# Altium PCB PCB2.PcbDoc
Units mil, origin at the board's own origin, x right, y up, seen from the top; angles counter-clockwise.
Board outline 3555 x 3545 mil, 4 copper layers (Top Layer, PWR, GND, Bottom Layer); 10 components, 72 nets, 433 pads, 0 vias.
Unrouted connection lines stored in the file: 94.
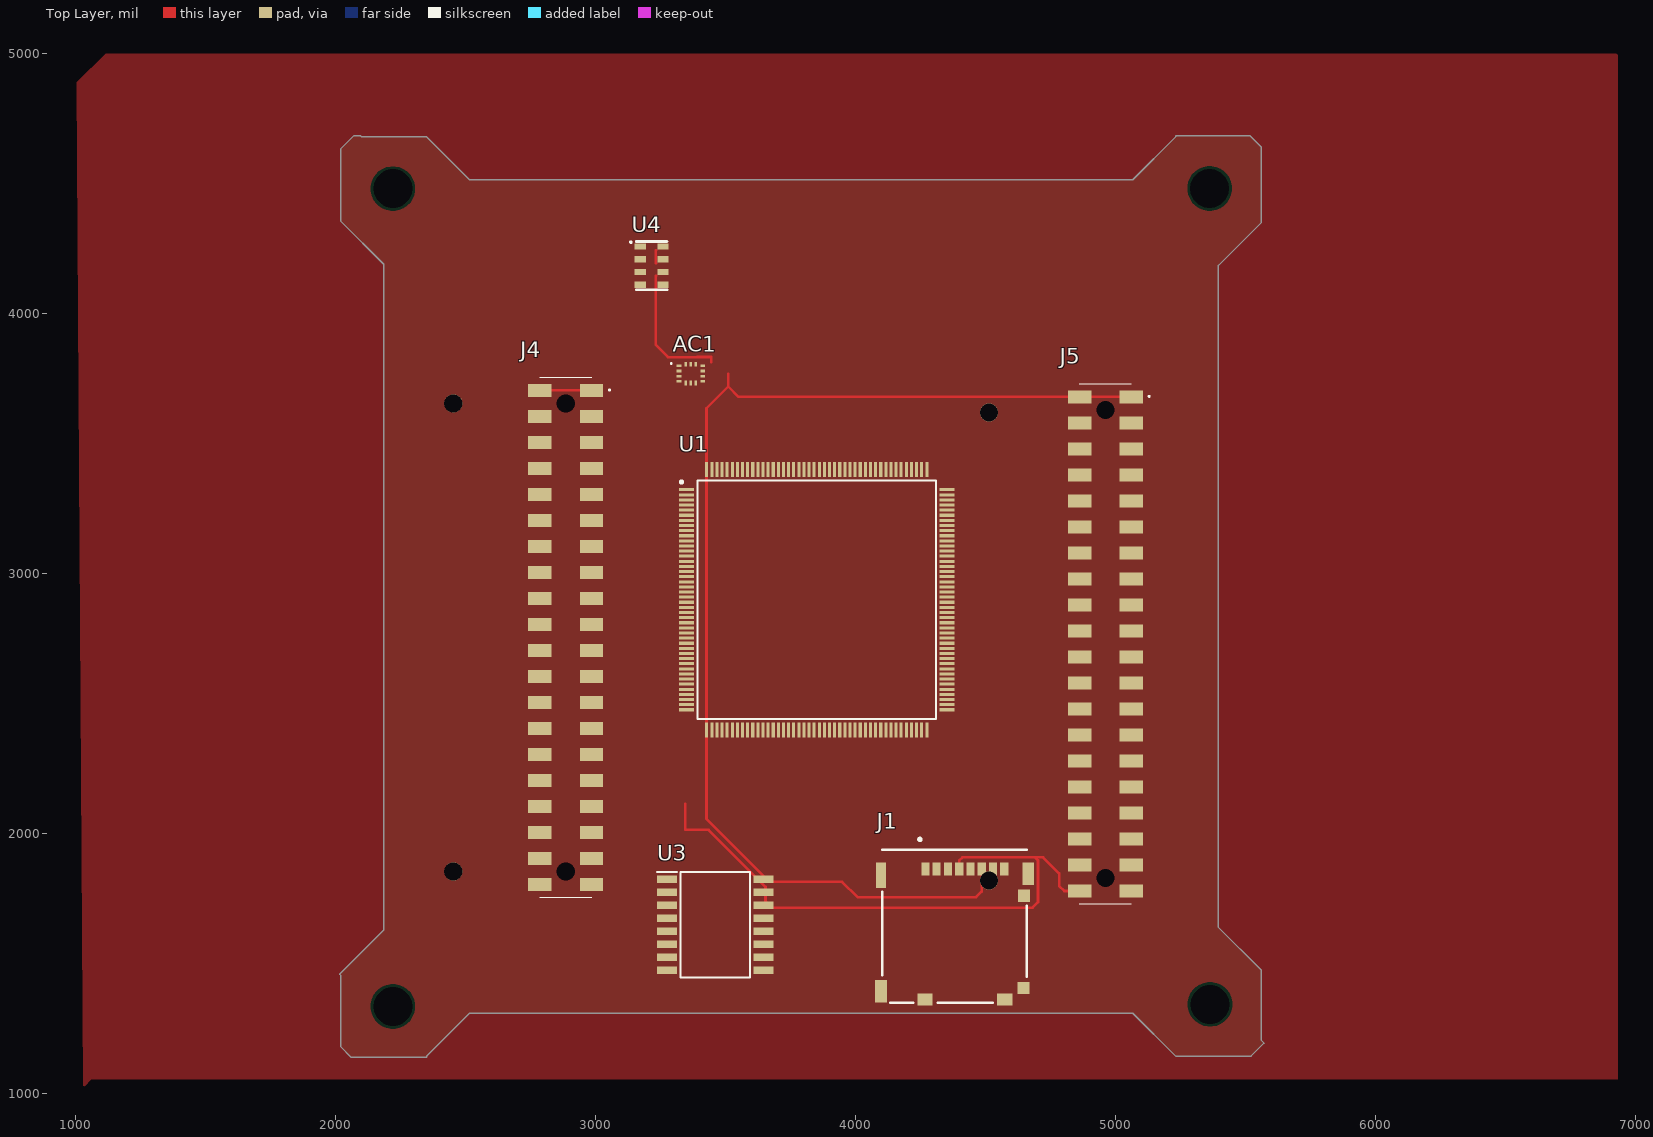
[diagram p0: Top Layer view]
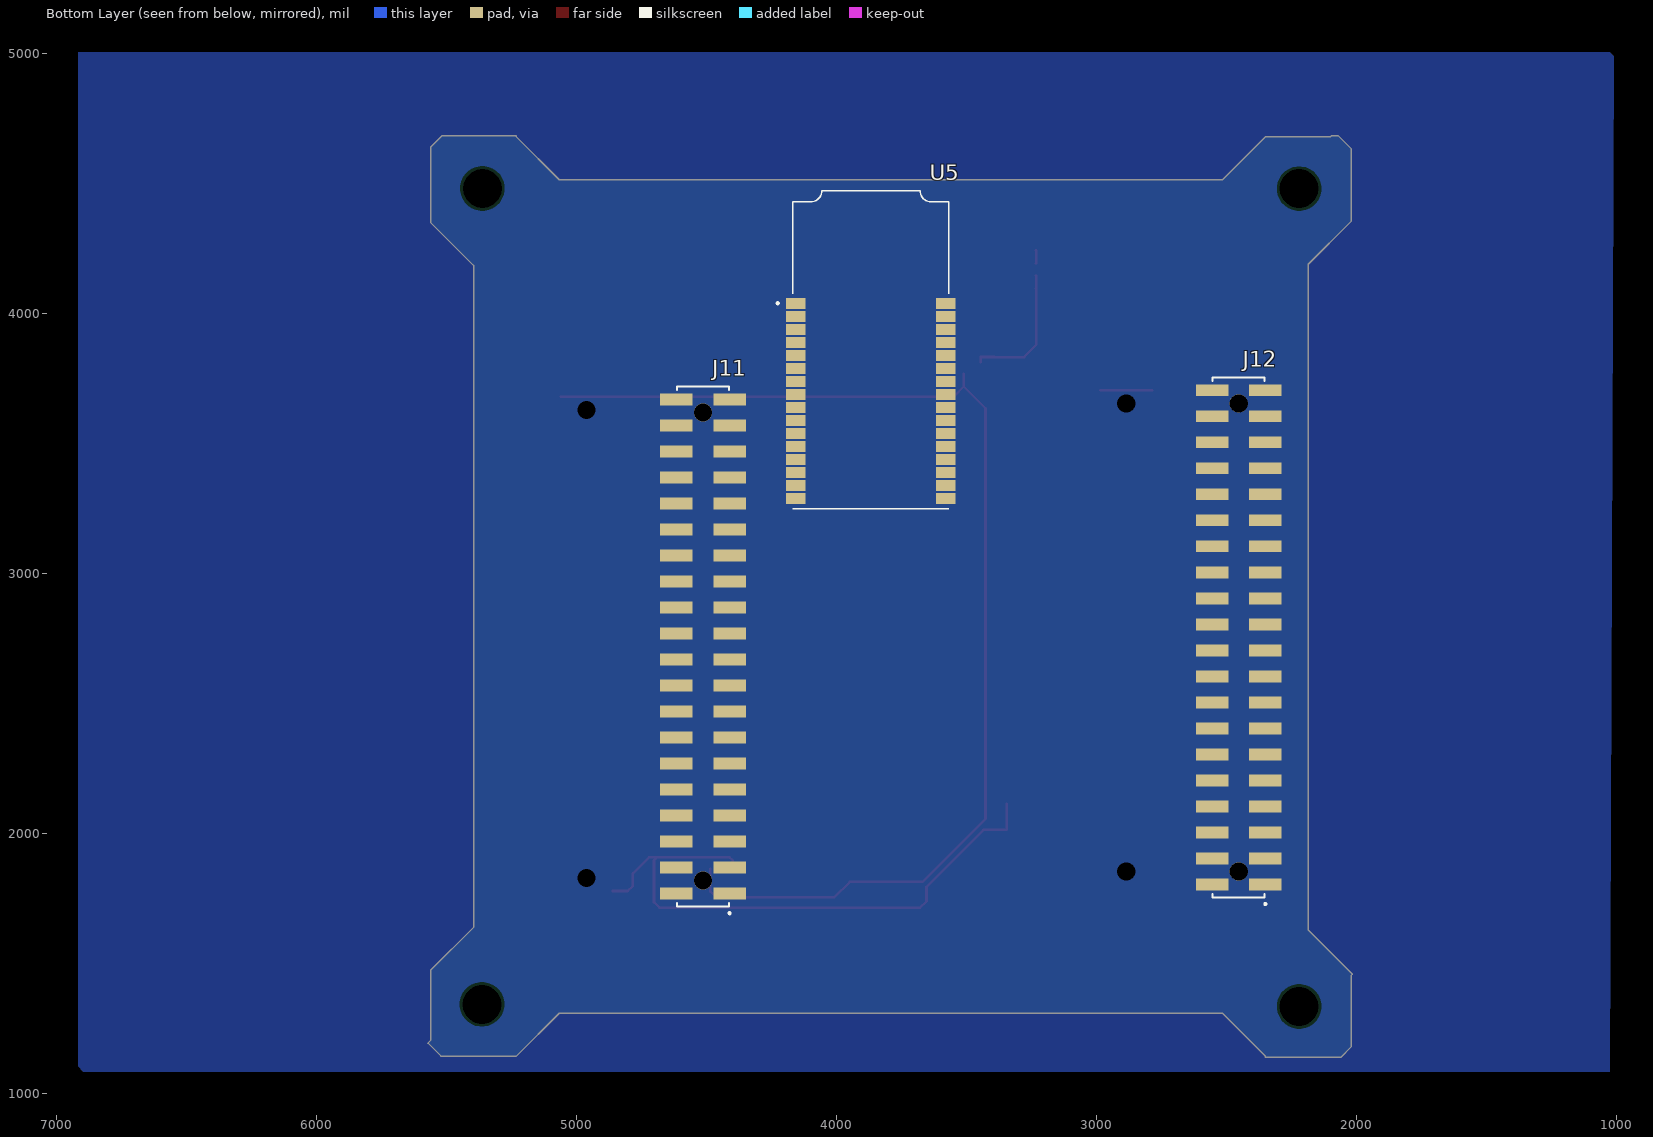
[diagram p1: Bottom Layer view, seen from below]
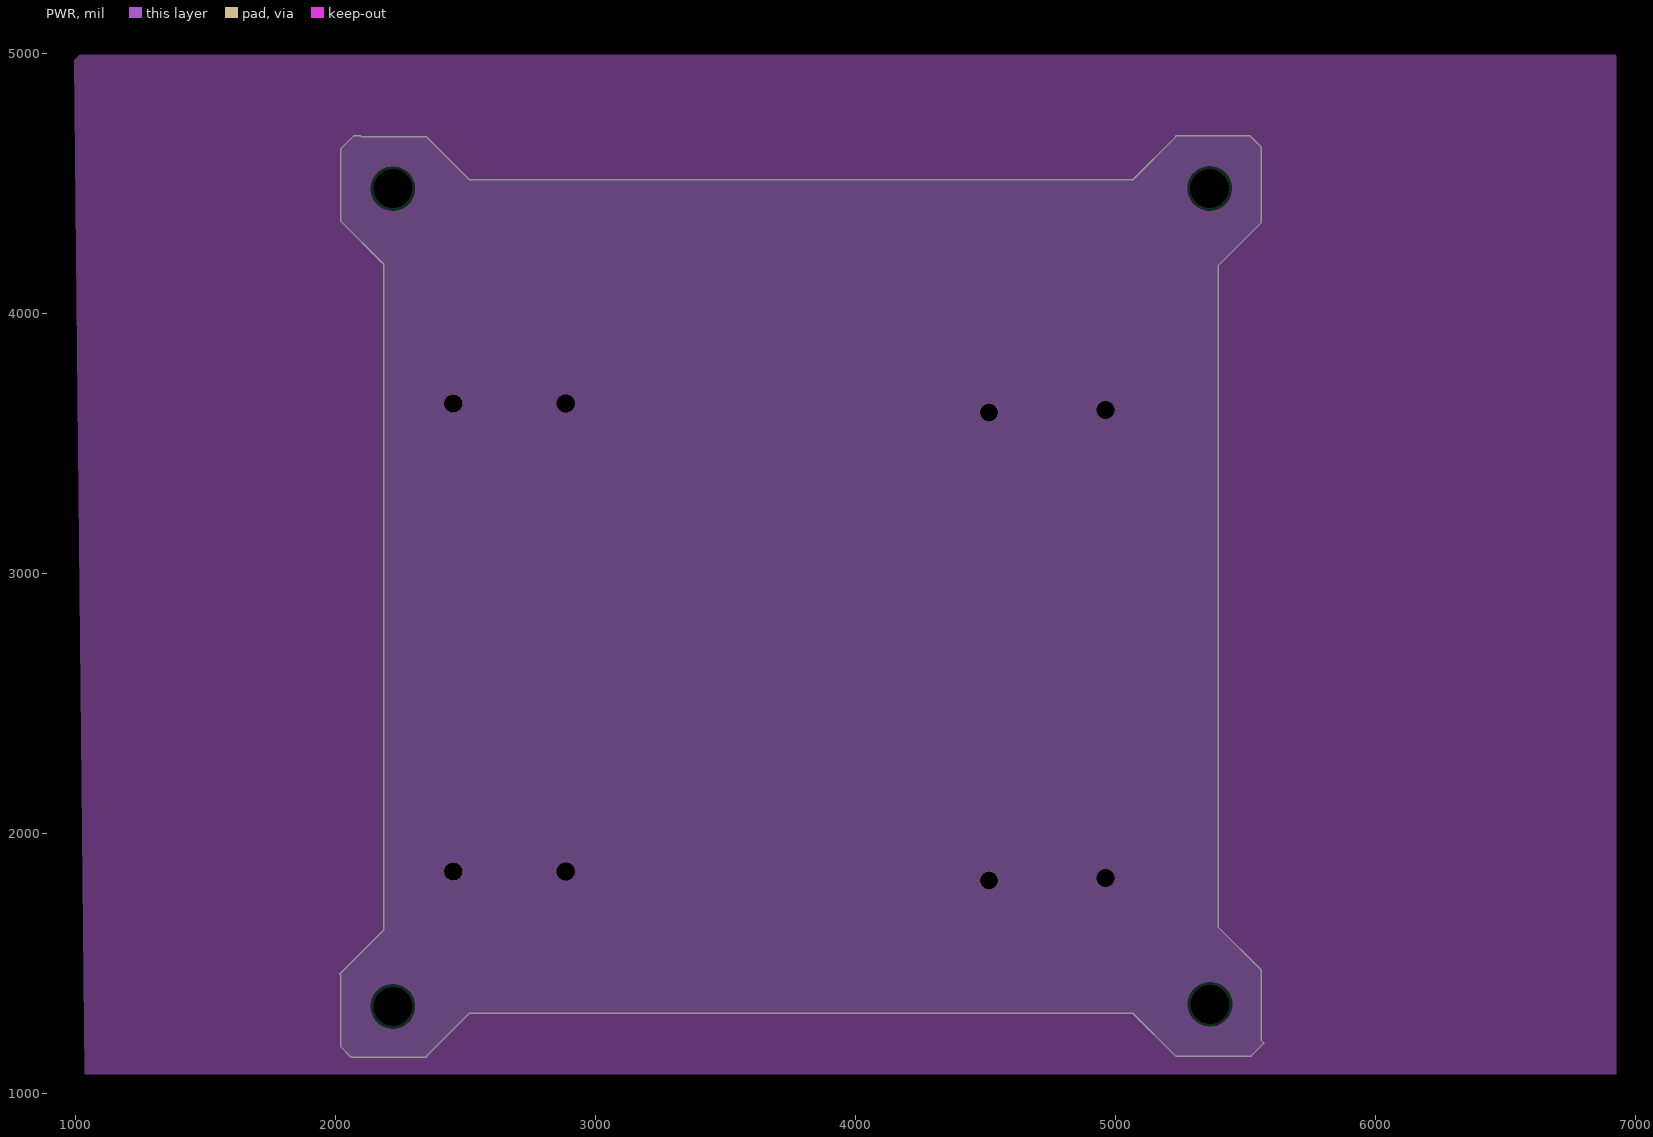
[diagram p2: PWR]
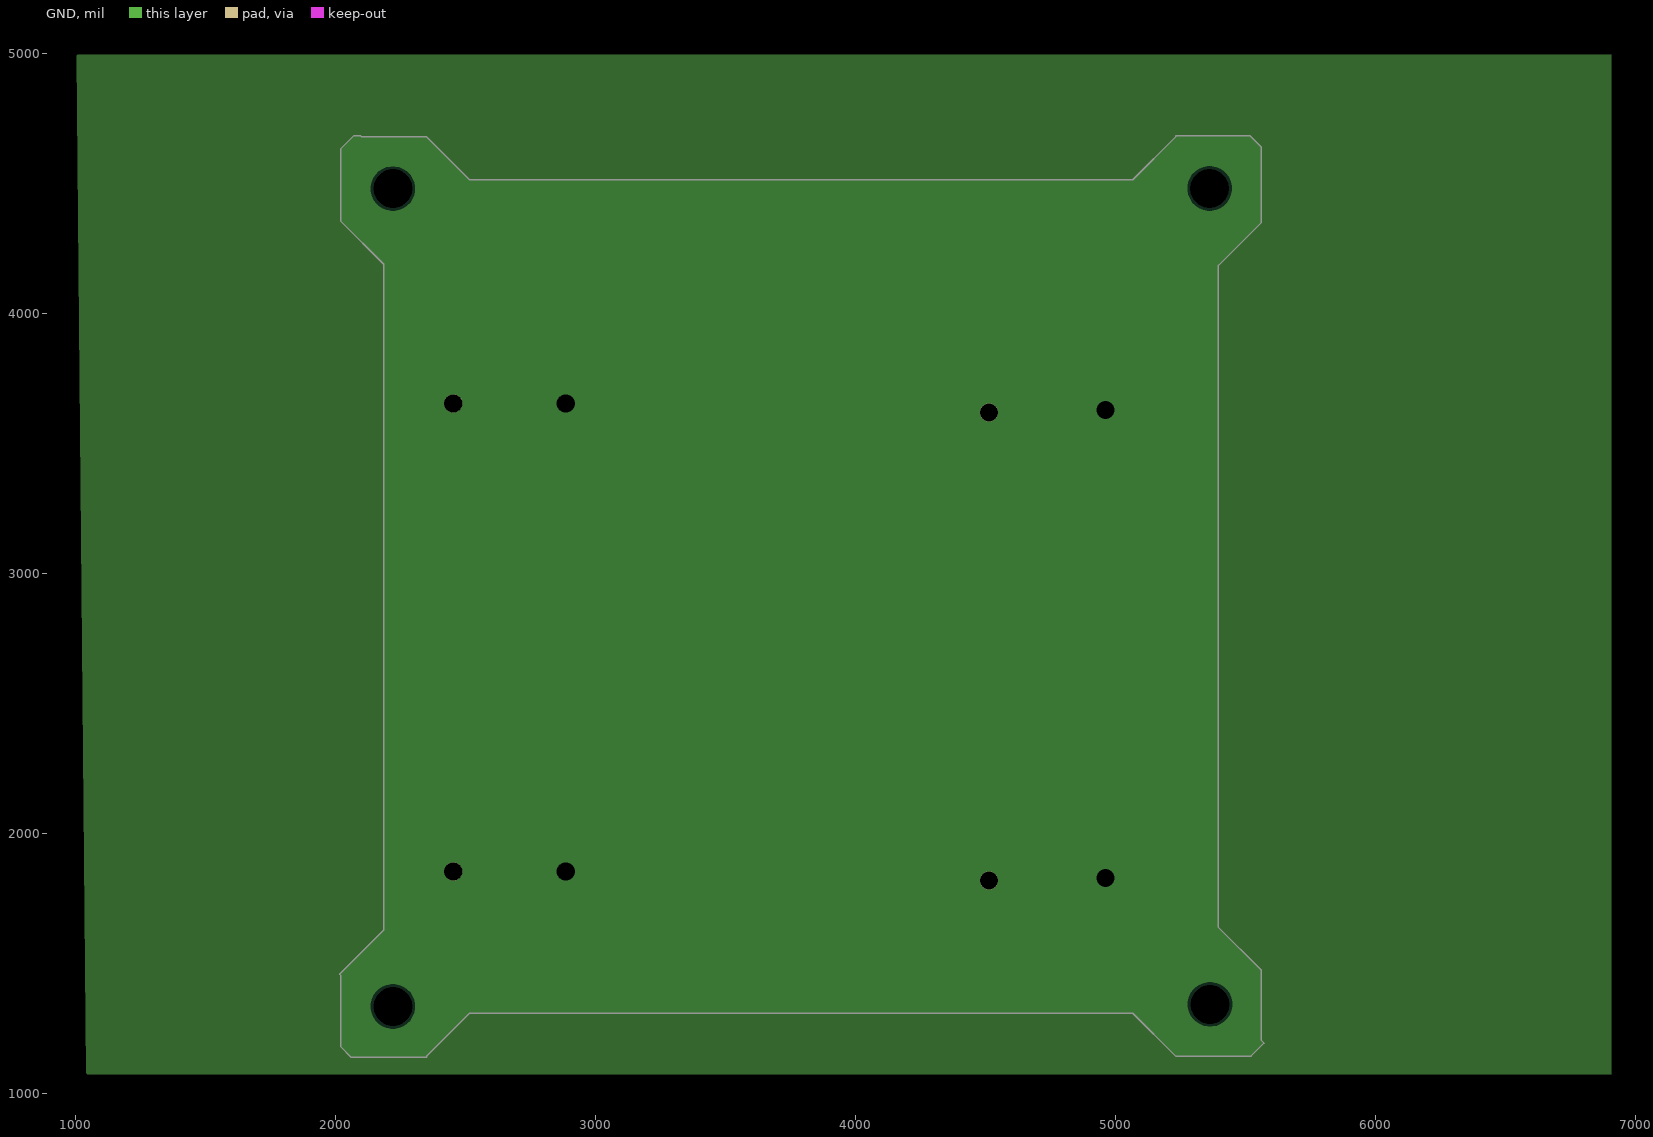
[diagram p3: GND]

## Layer stack, top to bottom
Top Solder: solder mask 0.4, Solder Resist, Dk 3.5
Top Layer: signal copper 1.4
Dielectric 2: prepreg 12.6, FR-4, Dk 4.8
PWR: signal copper 0.3543
Dielectric 1: dielectric 12.6, FR-4, Dk 4.8
GND: signal copper 0.3543
Dielectric 3: prepreg 12.6, FR-4, Dk 4.8
Bottom Layer: signal copper 1.4
Bottom Solder: solder mask 0.4, Solder Resist, Dk 3.5

## Board outline
2185,1630 2015,1460 2020,1455 2020,1180 2060,1140 2350,1140 2350,1145 2515,1310 5065,1310 5230,1145 5520,1145 5570,1195 5560,1205 5560,1475 5395,1640 5395,4185.72 5560,4350.72 5560,4640 5515,4685 5230,4685 5230,4680 5065,4515 2515,4515 2350,4680 2100,4680 2095,4685 2070,4685 2020,4635 2020,4355 2185,4190

## Design rules (kind name [scope] priority, off if disabled: settings)
Clearance [All] p1: gap=10 ignorepadtopadclearanceinfootprint=FALSE except(0: Arc-Hole Track-Hole SMDPad-Hole THPad-Hole Via-Hole Fill-Hole Poly-Hole Region-Hole Text-Hole)
PolygonConnect [All] p1: connectstyle=Relief reliefconductorwidth=10 reliefentries=4 polygonreliefangle="90 Angle" airgapwidth=10
RoutingVias [All] p1: holewidth=28 width=50 viastyle="Through Hole" minholewidth=28 minwidth=50 maxholewidth=28 maxwidth=50
SolderMaskExpansion [All] p1: expansion=4 istentingtop=FALSE
Width [All] p1: maxlimit=10 minlimit=10 preferedwidth=10
30 further rules are at their usual default settings.

## Components (designator, comment, footprint, x,y, rotation, side; value= is the part's Value field where it differs from the comment)
AC1 "LSM6DSOTR" LGA-14(2.5X3X0.86) 3365.77,3769.84 r0 top
J1 "503182-1852" 5031821852 4380,1840 r0 top
J4 "HLE-120-02-L-DV-A" HLE-120-02-XXX-DV-A 2884.41,2755 r90 top
J5 "HLE-120-02-L-DV-A" HLE-120-02-XXX-DV-A 4960,2730 r90 top
J11 "HW-20-16-L-D-250-SM-A-TR" SAMTEC_HW-20-16-L-D-250-SM-A-TR 4410,1770 r90 bottom
J12 "HW-20-16-L-D-250-SM-A-TR" SAMTEC_HW-20-16-L-D-250-SM-A-TR 2350,1805 r90 bottom
U1 "STM32H747IGT6" QFP50P2600X2600X160-176N 3850,2900 r0 top
U3 "W25Q256JVFIQ" SOIC127P1032X264-16N 3460,1650 r0 top
U4 "MS561101BA03-50" MS561101BA03-50 3215,4185 r0 top
U5 "STLINK-V3MODS" MODULE_STLINK-V3MODS 3866.81,4430 r180 bottom

## Footprints (in the part's own frame and the unit in brackets; to place one, negate y for a bottom-side part, rotate by r counter-clockwise, add the part's x,y. Pads: shape width x height; smd on the part's side, far side on the other; paste and mask are expansions set on the pad)
5031821852 [mm]
  rect 0.8x1.24 smd: 1(-2.85,0.63) 2(-1.75,0.63) 3(-0.65,0.63) 4(0.45,0.63) 5(1.55,0.63) 6(2.65,0.63) 7(3.75,0.63) 8(4.85,0.63)
  rect 0.95x2.5 smd: 9(-7.195,0)
  rect 1.15x2.2 smd: 10(7.195,0.15) 15(-7.195,-11.33)
  rect 1.16x1.25 smd: 11(6.795,-2)
  rect 1.16x1.2 smd: 12(6.74,-11)
  rect 1.5x1.15 smd: 13(4.89,-12.125) 14(-2.89,-12.125)
  silkscreen extent -7.07,-12.45 7.07,3.66, body extent -7.47,-12.4 7.47,2.55, height 1.51
HLE-120-02-XXX-DV-A [mm]
  rect 1.27x2.29 smd: 1(24.13,-2.525) 2(24.13,2.525) 3(21.59,-2.525) 4(21.59,2.525) 5(19.05,-2.525) 6(19.05,2.525) 7(16.51,-2.525) 8(16.51,2.525) 9(13.97,-2.525) 10(13.97,2.525) 11(11.43,-2.525) 12(11.43,2.525) 13(8.89,-2.525) 14(8.89,2.525) 15(6.35,-2.525) 16(6.35,2.525) 17(3.81,-2.525) 18(3.81,2.525) 19(1.27,-2.525) 20(1.27,2.525) 21(-1.27,-2.525) 22(-1.27,2.525) 23(-3.81,-2.525) 24(-3.81,2.525) 25(-6.35,-2.525) 26(-6.35,2.525) 27(-8.89,-2.525) 28(-8.89,2.525) 29(-11.43,-2.525) 30(-11.43,2.525) 31(-13.97,-2.525) 32(-13.97,2.525) 33(-16.51,-2.525) 34(-16.51,2.525) 35(-19.05,-2.525) 36(-19.05,2.525) 37(-21.59,-2.525) 38(-21.59,2.525) 39(-24.13,-2.525) 40(-24.13,2.525)
  round 0.89 hole 1.78 unplated: 41(22.86,0) 42(-22.86,0)
  silkscreen extent -25.4,-4.33 25.4,2.54
LGA-14(2.5X3X0.86) [mm]
  rect 0.475x0.25 smd: 1(-1.163,0.75) 2(-1.163,0.25) 3(-1.163,-0.25) 4(-1.163,-0.75) 8(1.163,-0.75) 9(1.163,-0.25) 10(1.163,0.25) 11(1.163,0.75)
  rect 0.25x0.475 smd: 5(-0.5,-0.912) 6(0,-0.912) 7(0.5,-0.912) 12(0.5,0.913) 13(0,0.913) 14(-0.5,0.913)
  silkscreen extent -1.93,0.95 -1.88,1.01, body extent -1.5,-1.25 1.5,1.25, height 0.86
MODULE_STLINK-V3MODS [mil]
  rect 74.8x42.13 smd: 1(-288.19,-390) 2(-288.19,-440) 3(-288.19,-490) 4(-288.19,-540) 5(-288.19,-590) 6(-288.19,-640) 7(-288.19,-690) 8(-288.19,-740) 9(-288.19,-790) 10(-288.19,-840) 11(-288.19,-890) 12(-288.19,-940) 13(-288.19,-990) 14(-288.19,-1040) 15(-288.19,-1090) 16(-288.19,-1140) 17(288.19,-1140) 18(288.19,-1090) 19(288.19,-1040) 20(288.19,-990) 21(288.19,-940) 22(288.19,-890) 23(288.19,-840) 24(288.19,-790) 25(288.19,-740) 26(288.19,-690) 27(288.19,-640) 28(288.19,-590) 29(288.19,-540) 30(288.19,-490) 31(288.19,-440) 32(288.19,-390)
  silkscreen extent -362,-1180 300,43
MS561101BA03-50 [mm]
  rect 1.1x0.6 smd: 1(-1.1,1.875) 2(-1.1,0.625) 3(-1.1,-0.625) 4(-1.1,-1.875) 5(1.1,-1.875) 6(1.1,-0.625) 7(1.1,0.625) 8(1.1,1.875)
  silkscreen extent -2.08,-2.35 1.5,2.35, body extent -1.5,-2.5 1.5,2.5, height 0.95
QFP50P2600X2600X160-176N [mm]
  rect 1.45x0.3 smd: 1(-12.725,10.75) 2(-12.725,10.25) 3(-12.725,9.75) 4(-12.725,9.25) 5(-12.725,8.75) 6(-12.725,8.25) 7(-12.725,7.75) 8(-12.725,7.25) 9(-12.725,6.75) 10(-12.725,6.25) 11(-12.725,5.75) 12(-12.725,5.25) 13(-12.725,4.75) 14(-12.725,4.25) 15(-12.725,3.75) 16(-12.725,3.25) 17(-12.725,2.75) 18(-12.725,2.25) 19(-12.725,1.75) 20(-12.725,1.25) 21(-12.725,0.75) 22(-12.725,0.25) 23(-12.725,-0.25) 24(-12.725,-0.75) 25(-12.725,-1.25) 26(-12.725,-1.75) 27(-12.725,-2.25) 28(-12.725,-2.75) 29(-12.725,-3.25) 30(-12.725,-3.75) 31(-12.725,-4.25) 32(-12.725,-4.75) 33(-12.725,-5.25) 34(-12.725,-5.75) 35(-12.725,-6.25) 36(-12.725,-6.75) 37(-12.725,-7.25) 38(-12.725,-7.75) 39(-12.725,-8.25) 40(-12.725,-8.75) 41(-12.725,-9.25) 42(-12.725,-9.75) 43(-12.725,-10.25) 44(-12.725,-10.75) 89(12.725,-10.75) 90(12.725,-10.25) 91(12.725,-9.75) 92(12.725,-9.25) 93(12.725,-8.75) 94(12.725,-8.25) 95(12.725,-7.75) 96(12.725,-7.25) 97(12.725,-6.75) 98(12.725,-6.25) 99(12.725,-5.75) 100(12.725,-5.25) 101(12.725,-4.75) 102(12.725,-4.25) 103(12.725,-3.75) 104(12.725,-3.25) 105(12.725,-2.75) 106(12.725,-2.25) 107(12.725,-1.75) 108(12.725,-1.25) 109(12.725,-0.75) 110(12.725,-0.25) 111(12.725,0.25) 112(12.725,0.75) 113(12.725,1.25) 114(12.725,1.75) 115(12.725,2.25) 116(12.725,2.75) 117(12.725,3.25) 118(12.725,3.75) 119(12.725,4.25) 120(12.725,4.75) 121(12.725,5.25) 122(12.725,5.75) 123(12.725,6.25) 124(12.725,6.75) 125(12.725,7.25) 126(12.725,7.75) 127(12.725,8.25) 128(12.725,8.75) 129(12.725,9.25) 130(12.725,9.75) 131(12.725,10.25) 132(12.725,10.75)
  rect 0.3x1.45 smd: 45(-10.75,-12.725) 46(-10.25,-12.725) 47(-9.75,-12.725) 48(-9.25,-12.725) 49(-8.75,-12.725) 50(-8.25,-12.725) 51(-7.75,-12.725) 52(-7.25,-12.725) 53(-6.75,-12.725) 54(-6.25,-12.725) 55(-5.75,-12.725) 56(-5.25,-12.725) 57(-4.75,-12.725) 58(-4.25,-12.725) 59(-3.75,-12.725) 60(-3.25,-12.725) 61(-2.75,-12.725) 62(-2.25,-12.725) 63(-1.75,-12.725) 64(-1.25,-12.725) 65(-0.75,-12.725) 66(-0.25,-12.725) 67(0.25,-12.725) 68(0.75,-12.725) 69(1.25,-12.725) 70(1.75,-12.725) 71(2.25,-12.725) 72(2.75,-12.725) 73(3.25,-12.725) 74(3.75,-12.725) 75(4.25,-12.725) 76(4.75,-12.725) 77(5.25,-12.725) 78(5.75,-12.725) 79(6.25,-12.725) 80(6.75,-12.725) 81(7.25,-12.725) 82(7.75,-12.725) 83(8.25,-12.725) 84(8.75,-12.725) 85(9.25,-12.725) 86(9.75,-12.725) 87(10.25,-12.725) 88(10.75,-12.725) 133(10.75,12.725) 134(10.25,12.725) 135(9.75,12.725) 136(9.25,12.725) 137(8.75,12.725) 138(8.25,12.725) 139(7.75,12.725) 140(7.25,12.725) 141(6.75,12.725) 142(6.25,12.725) 143(5.75,12.725) 144(5.25,12.725) 145(4.75,12.725) 146(4.25,12.725) 147(3.75,12.725) 148(3.25,12.725) 149(2.75,12.725) 150(2.25,12.725) 151(1.75,12.725) 152(1.25,12.725) 153(0.75,12.725) 154(0.25,12.725) 155(-0.25,12.725) 156(-0.75,12.725) 157(-1.25,12.725) 158(-1.75,12.725) 159(-2.25,12.725) 160(-2.75,12.725) 161(-3.25,12.725) 162(-3.75,12.725) 163(-4.25,12.725) 164(-4.75,12.725) 165(-5.25,12.725) 166(-5.75,12.725) 167(-6.25,12.725) 168(-6.75,12.725) 169(-7.25,12.725) 170(-7.75,12.725) 171(-8.25,12.725) 172(-8.75,12.725) 173(-9.25,12.725) 174(-9.75,12.725) 175(-10.25,12.725) 176(-10.75,12.725)
  silkscreen extent -13.32,-11.65 11.65,11.65
SAMTEC_HW-20-16-L-D-250-SM-A-TR [mm]
  rect 1.14x3.175 smd: 01(0,0) 02(0,5.205) 03(2.54,0) 04(2.54,5.205) 05(5.08,0) 06(5.08,5.205) 07(7.62,0) 08(7.62,5.205) 09(10.16,0) 10(10.16,5.205) 11(12.7,0) 12(12.7,5.205) 13(15.24,0) 14(15.24,5.205) 15(17.78,0) 16(17.78,5.205) 17(20.32,0) 18(20.32,5.205) 19(22.86,0) 20(22.86,5.205) 21(25.4,0) 22(25.4,5.205) 23(27.94,0) 24(27.94,5.205) 25(30.48,0) 26(30.48,5.205) 27(33.02,0) 28(33.02,5.205) 29(35.56,0) 30(35.56,5.205) 31(38.1,0) 32(38.1,5.205) 33(40.64,0) 34(40.64,5.205) 35(43.18,0) 36(43.18,5.205) 37(45.72,0) 38(45.72,5.205) 39(48.26,0) 40(48.26,5.205)
  round 1.78 hole 1.78 unplated: ""(1.27,2.603) ""(46.99,2.603)
  silkscreen extent -2.02,-0.1 49.53,5.14
SOIC127P1032X264-16N [mm]
  rect 1.93x0.7 smd: 1(-4.71,4.445) 2(-4.71,3.175) 3(-4.71,1.905) 4(-4.71,0.635) 5(-4.71,-0.635) 6(-4.71,-1.905) 7(-4.71,-3.175) 8(-4.71,-4.445) 9(4.71,-4.445) 10(4.71,-3.175) 11(4.71,-1.905) 12(4.71,-0.635) 13(4.71,0.635) 14(4.71,1.905) 15(4.71,3.175) 16(4.71,4.445)
  silkscreen extent -5.68,-5.14 3.4,5.15, body extent -5.16,-5.14 5.16,5.14, height 2.64

## Part data
AC1: "Accelerometer", Manufacturer_Name=STMicroelectronics, Mouser Part Number=511-LSM6DSOTR, Arrow Part Number=LSM6DSOTR, Arrow Price/Stock=https://www.arrow.com/en/products/lsm6dsotr/stmicroelectronics?region=nac, Datasheet Link=https://www.st.com/resource/en/datasheet/lsm6dso.pdf, Manufacturer_Part_Number=LSM6DSOTR, Mouser Price/Stock=https://www.mouser.co.uk/ProductDetail/STMicroelectronics/LSM6DSOTR?qs=lc2O%252BfHJPVbD197C5c7oNw%3D%3D
J1: "Connector", Manufacturer_Name=Molex, Mouser Part Number=538-503182-1852, Datasheet Link=https://www.molex.com/pdm_docs/sd/5031821852_sd.pdf, Manufacturer_Part_Number=503182-1852, Mouser Price/Stock=https://www.mouser.co.uk/ProductDetail/Molex/503182-1852?qs=s7UCm7gO1bZmpyAhCKZ26g%3D%3D
J4 J5: "Connector", Manufacturer_Name=SAMTEC, Mouser Part Number=200-HLE12002LDVA, Arrow Part Number=HLE-120-02-L-DV-A, Arrow Price/Stock=https://www.arrow.com/en/products/hle-120-02-l-dv-a/samtec?region=nac, Datasheet Link=http://suddendocs.samtec.com/prints/hle-1xx-02-xxx-dv-xx-xx-xx-mkt.pdf, Manufacturer_Part_Number=HLE-120-02-L-DV-A, Mouser Price/Stock=https://www.mouser.co.uk/ProductDetail/Samtec/HLE-120-02-L-DV-A?qs=0lQeLiL1qyZq0rwGrAI%2FeQ%3D%3D
J11 J12: Package=None, Availability=Unavailable, MP=HW-20-16-L-D-250-SM-A-TR, Price=None
U1: "ARM Microcontrollers - MCU 16/32-BITS MICROS", Manufacturer_Name=STMicroelectronics, Mouser Part Number=511-STM32H747IGT6, Arrow Part Number=STM32H747IGT6, Arrow Price/Stock=https://www.arrow.com/en/products/stm32h747igt6/stmicroelectronics?region=nac, Datasheet Link=https://www.mouser.com/datasheet/2/389/dm00602212-1799407.pdf, Geometry.Height=1.6mm, Manufacturer_Part_Number=STM32H747IGT6, Mouser Price/Stock=https://www.mouser.co.uk/ProductDetail/STMicroelectronics/STM32H747IGT6?qs=%252B6g0mu59x7Kw%252BsPEalqvLg%3D%3D
U3: "Integrated Circuit", Manufacturer_Name=Winbond, Mouser Part Number=454-W25Q256JVFIQ, Arrow Part Number=W25Q256JVFIQ, Arrow Price/Stock=https://www.arrow.com/en/products/w25q256jvfiq/winbond-electronics?region=nac, Datasheet Link=https://www.winbond.com/hq/search-resource-file.jsp?partNo=W25Q256JVFIQ&type=datasheet, Height=2.64mm, Manufacturer_Part_Number=W25Q256JVFIQ, Mouser Price/Stock=https://www.mouser.co.uk/ProductDetail/Winbond/W25Q256JVFIQ?qs=qSfuJ%252Bfl%2Fd66Mf%2FmOCw4Wg%3D%3D
U4: "Integrated Circuit", Manufacturer_Name="TE Connectivity", Mouser Part Number=824-MS561101BA03-50, Arrow Part Number=MS561101BA03-50, Arrow Price/Stock=https://www.arrow.com/en/products/ms561101ba03-50/te-connectivity?region=nac, Datasheet Link=http://www.te.com/usa-en/search.html?q=ms5611&source=header, Manufacturer_Part_Number=MS561101BA03-50, Mouser Price/Stock=https://www.mouser.co.uk/ProductDetail/Measurement-Specialties/MS561101BA03-50?qs=%252BgKeJhng5iV%252BnCz6Qd5iDw%3D%3D
U5: library part CMP-005-000000-1, Package=None, Availability=Unavailable, Component Type=Standard, Design Item ID=STLINK-V3MODS, MP=STLINK-V3MODS, Pin Count=32, Price=None, Source=STLINK-V3MODS.SchLib

## Free pads (board coordinates)
  round 60 hole 150 unplated mask+10: 2(2220,1336) 2(2220,4481) 2(5360.95,4481.67) 2(5362.55,1344.01)

## Nets (pads, with @x,y where several pads share a name; then routed paths per layer and width w, separated by ;. In a path a pad name is that pad's centre, name@x,y a point inside that pad or via, vN(x,y) a via of type N, cw(c..) or ccw(c..) an arc to the next point about the centre after c; other vN are vias at no path point)
Battery-PWR: AC1.5 AC1.8 J1.4 J5.40 J11.02 U1.160 U3.1 U3.2 U3.3 U4.1 U4.2 | length 2431.5
  Top Layer w10: 3231.69,4194.61 3231,4194.61 3231,4243.82 3231.69,4243.82 ; 3344.57,2065 3344,2065 ; 3344.57,2115 3344,2115 3344,2065 ; J1.4 4397.72,1896.72 4410,1909 4690,1909 ; J5.40 4802,1780 4782,1800 4782,1847 4720,1909 4690,1909 ; 3344,2065 3344,2015 3344.57,2015 3434,2015 3653,1796 3653,1740 3677,1716 4680,1716 4701,1737 4701,1898 4690,1909
GND: AC1.1 AC1.2 AC1.3 AC1.6 AC1.7 J1.6 J4.1 J4.2 J5.1 J5.2 J11.39 J11.40 J12.39 J12.40 U3.10 U4.3 U4.4 | length 5311.5
  Top Layer w10: J4.2 2881,3705 2882,3706 2933,3706 2934,3705 J4.1 ; 3231.69,4096.18 3231,4096.18 ; 3231.69,4145.39 3231,4145.39 3231,4096.18 ; 3444.23,3813.92 3444.23,3833.6 3390.6,3833.6 3390,3833 3278,3833 3231,3880 3231,4096.18 ; 3509.69,3768.15 3509.69,3720 ; J1.6 4484.33,1777 4463.33,1756 4007,1756 3948,1815 3715.43,1815 3668,1815 3426,2057 3426,3636.31 3509.69,3720 ; J5.1 5011,3680 5010,3681 4911,3681 4910,3680 J5.2 3549.69,3680 3509.69,3720
GPIO1: J11.28 U1.1
GPIO2: J11.30 U1.2
GPIO3: J11.32 U1.3
GPIO4: J11.34 U1.171
GPIO5: J11.36 U1.170
GPIO6: J11.38 U1.9
GPIO7: J12.19 U1.34
GPIO8: J12.21 U1.37
GPIO9: J12.23 U1.60
GPIO10: J12.25 U1.61
GPIO11: J12.27 U1.62
GPIO12: J12.29 U1.63
GPIO13: J12.31 U1.90
GPIO14: J12.33 U1.91
GPIO15: J12.35 U1.94
GPIO16: J12.37 U1.95
GPIO17: J12.04 U1.96
GPIO18: J12.06 U1.97
GPIO19: J12.08 U1.98
GPIO20: J12.10 U1.110
GPIO21: J12.12 U1.111
GPIO22: J12.14 U1.114
GPIO23: J12.16 U1.115
GPIO24: J11.03 U1.116
GPIO25: J11.05 U1.117
GPIO26: J11.07 U1.118
GPIO27: J11.09 U1.127
GPIO28: J11.11 U1.128
GPIO29: J11.13 U1.129
GPIO30: J11.15 U1.130
HCLK: J1.5 U1.50
HCS: J1.2 U1.49
HMISO: J1.7 U1.51
HMOSI: J1.3 U1.52
I2C2-SCL: J12.15 U1.19
I2C2-SDA: J12.13 U1.18
IO2: U1.23 U3.7
NetAC1_12: AC1.12
NetR4_2: U3.9
NRST(Reset): U1.33 U5.31
SCL: AC1.13 U1.165 U4.8
SDA: AC1.14 U1.166 U4.7
SPI2-MISO: J12.05 U1.36
SPI2-MOSI: J12.03 U1.35
SPI2-SCK: J12.18 U1.86
SPI3-MISO: J12.07 U1.141
SPI3-MOSI: J12.09 U1.57
SPI3-SCK: J12.11 U1.140
SPI4-MISO: J11.04 U1.4
SPI4-MOSI: J11.06 U1.5
SPI4-SCK: J12.17 U1.74
STLINK-GND: U1.119 U5.24
STLINK-PWR: U1.126 U5.30
SWCLK: U1.138 U5.13
SWDIO: U1.132 U5.4
UART4-RX: J11.18 U1.42
UART4-TX: J11.16 U1.41
UART5-RX: J11.22 U1.85
UART5-TX: J11.20 U1.142
UART7-RX: U1.67 U5.11
UART7-TX: U1.68 U5.1
USART2-RX: J11.10 U1.46
USART2-TX: J11.08 U1.43
USART3-RX: J11.14 U1.79
USART3-TX: J11.12 U1.89
USART6-RX: J11.26 U1.123
USART6-TX: J11.24 U1.122
VCLK: U1.30 U3.16
VMISO: U1.29 U3.8
VMOSI: U1.28 U3.15
pads on no net: AC1.4 AC1.9 AC1.10 AC1.11 J1.1 J1.8 J1.9 J1.10 J1.11 J1.12 J1.13 J1.14 J1.15 J4.3 J4.4 J4.5 J4.6 J4.7 J4.8 J4.9 J4.10 J4.11 J4.12 J4.13 J4.14 J4.15 J4.16 J4.17 J4.18 J4.19 J4.20 J4.21 J4.22 J4.23 J4.24 J4.25 J4.26 J4.27 J4.28 J4.29 J4.30 J4.31 J4.32 J4.33 J4.34 J4.35 J4.36 J4.37 J4.38 J4.39 J4.40 J4.41 J4.42 J5.3 J5.4 J5.5 J5.6 J5.7 J5.8 J5.9 J5.10 J5.11 J5.12 J5.13 J5.14 J5.15 J5.16 J5.17 J5.18 J5.19 J5.20 J5.21 J5.22 J5.23 J5.24 J5.25 J5.26 J5.27 J5.28 J5.29 J5.30 J5.31 J5.32 J5.33 J5.34 J5.35 J5.36 J5.37 J5.38 J5.39 J5.41 J5.42 J11. J11.01 J11.17 J11.19 J11.21 J11.23 J11.25 J11.27 J11.29 J11.31 J11.33 J11.35 J11.37 J12. J12.01 J12.02 J12.20 J12.22 J12.24 J12.26 J12.28 J12.30 J12.32 J12.34 J12.36 J12.38 U1.6 U1.7 U1.8 U1.10 U1.11 U1.12 U1.13 U1.14 U1.15 U1.16 U1.17 U1.20 U1.21 U1.22 U1.24 U1.25 U1.26 U1.27 U1.31 U1.32 U1.38 U1.39 U1.40 U1.44 U1.45 U1.47 U1.48 U1.53 U1.54 U1.55 U1.56 U1.58 U1.59 U1.64 U1.65 U1.66 U1.69 U1.70 U1.71 U1.72 U1.73 U1.75 U1.76 U1.77 U1.78 U1.80 U1.81 U1.82 U1.83 U1.84 U1.87 U1.88 U1.92 U1.93 U1.99 U1.100 U1.101 U1.102 U1.103 U1.104 U1.105 U1.106 U1.107 U1.108 U1.109 U1.112 U1.113 U1.120 U1.121 U1.124 U1.125 U1.131 U1.133 U1.134 U1.135 U1.136 U1.137 U1.139 U1.143 U1.144 U1.145 U1.146 U1.147 U1.148 U1.149 U1.150 U1.151 U1.152 U1.153 U1.154 U1.155 U1.156 U1.157 U1.158 U1.159 U1.161 U1.162 U1.163 U1.164 U1.167 U1.168 U1.169 U1.172 U1.173 U1.174 U1.175 U1.176 U3.4 U3.5 U3.6 U3.11 U3.12 U3.13 U3.14 U4.5 U4.6 U5.2 U5.3 U5.5 U5.6 U5.7 U5.8 U5.9 U5.10 U5.12 U5.14 U5.15 U5.16 U5.17 U5.18 U5.19 U5.20 U5.21 U5.22 U5.23 U5.25 U5.26 U5.27 U5.28 U5.29 U5.32

## Polygon pours and split planes (outlines as drawn)
no net on Bottom Layer "NONET_L04_P004" (solid, pour order 4): 1025,1085 6895,1085 6915,1105 6915,5005 1025,5005 1010,4990
no net on GND "NONET_L03_P002" (solid, pour order 2): 1040,1080 1045,1075 6905,1075 6905,4995 1005,4995
no net on PWR "NONET_L02_P001" (solid, pour order 1): 1035,1070 1040,1075 6925,1075 6925,4990 6920,4995 1015,4995 995,4975
no net on Top Layer "NONET_L01_P000" (solid, pour order 0): 1030,1025 1060,1055 6930,1055 6930,4995 6925,5000 1115,5000 1005,4890

## Silkscreen, mask and mechanical layers (free items; w line width, h text height)
Mechanical 2:
  lines w4: 2185,1631 2020,1466 2020,1206 ccw(c2090,1206) 2090,1136 2350,1136 2522,1308 ; 2185,4186 2020,4351 2020,4611 cw(c2090,4611) 2090,4681 2350,4681 2515,4516 5065,4516 ; 2187.08,1634.09 2187.08,4184.09 ; 2525,1308.84 5067.72,1308.84 5232.55,1144.01 5492.55,1144.01 ccw(c5492.55,1214.01) 5562.55,1214.01 5562.55,1474.01 5397.55,1639.01 ; 5065.95,4516.67 5230.95,4681.67 5491.95,4681.67 cw(c5491.95,4612.67) 5560.95,4612.67 5560.95,4351.67 5395.95,4186.67 ; 5397.08,1639.09 5397.08,4189.09